# Altium PCB voltage_monitor_003.PcbDoc
Units mil, origin at the board's own origin, x right, y up, seen from the top; angles counter-clockwise.
Board outline 1417.32 x 1417.32 mil, 2 copper layers (Top Layer, Bottom Layer); 12 components, 15 nets, 58 pads, 27 vias.
Unrouted connection lines stored in the file: 1.
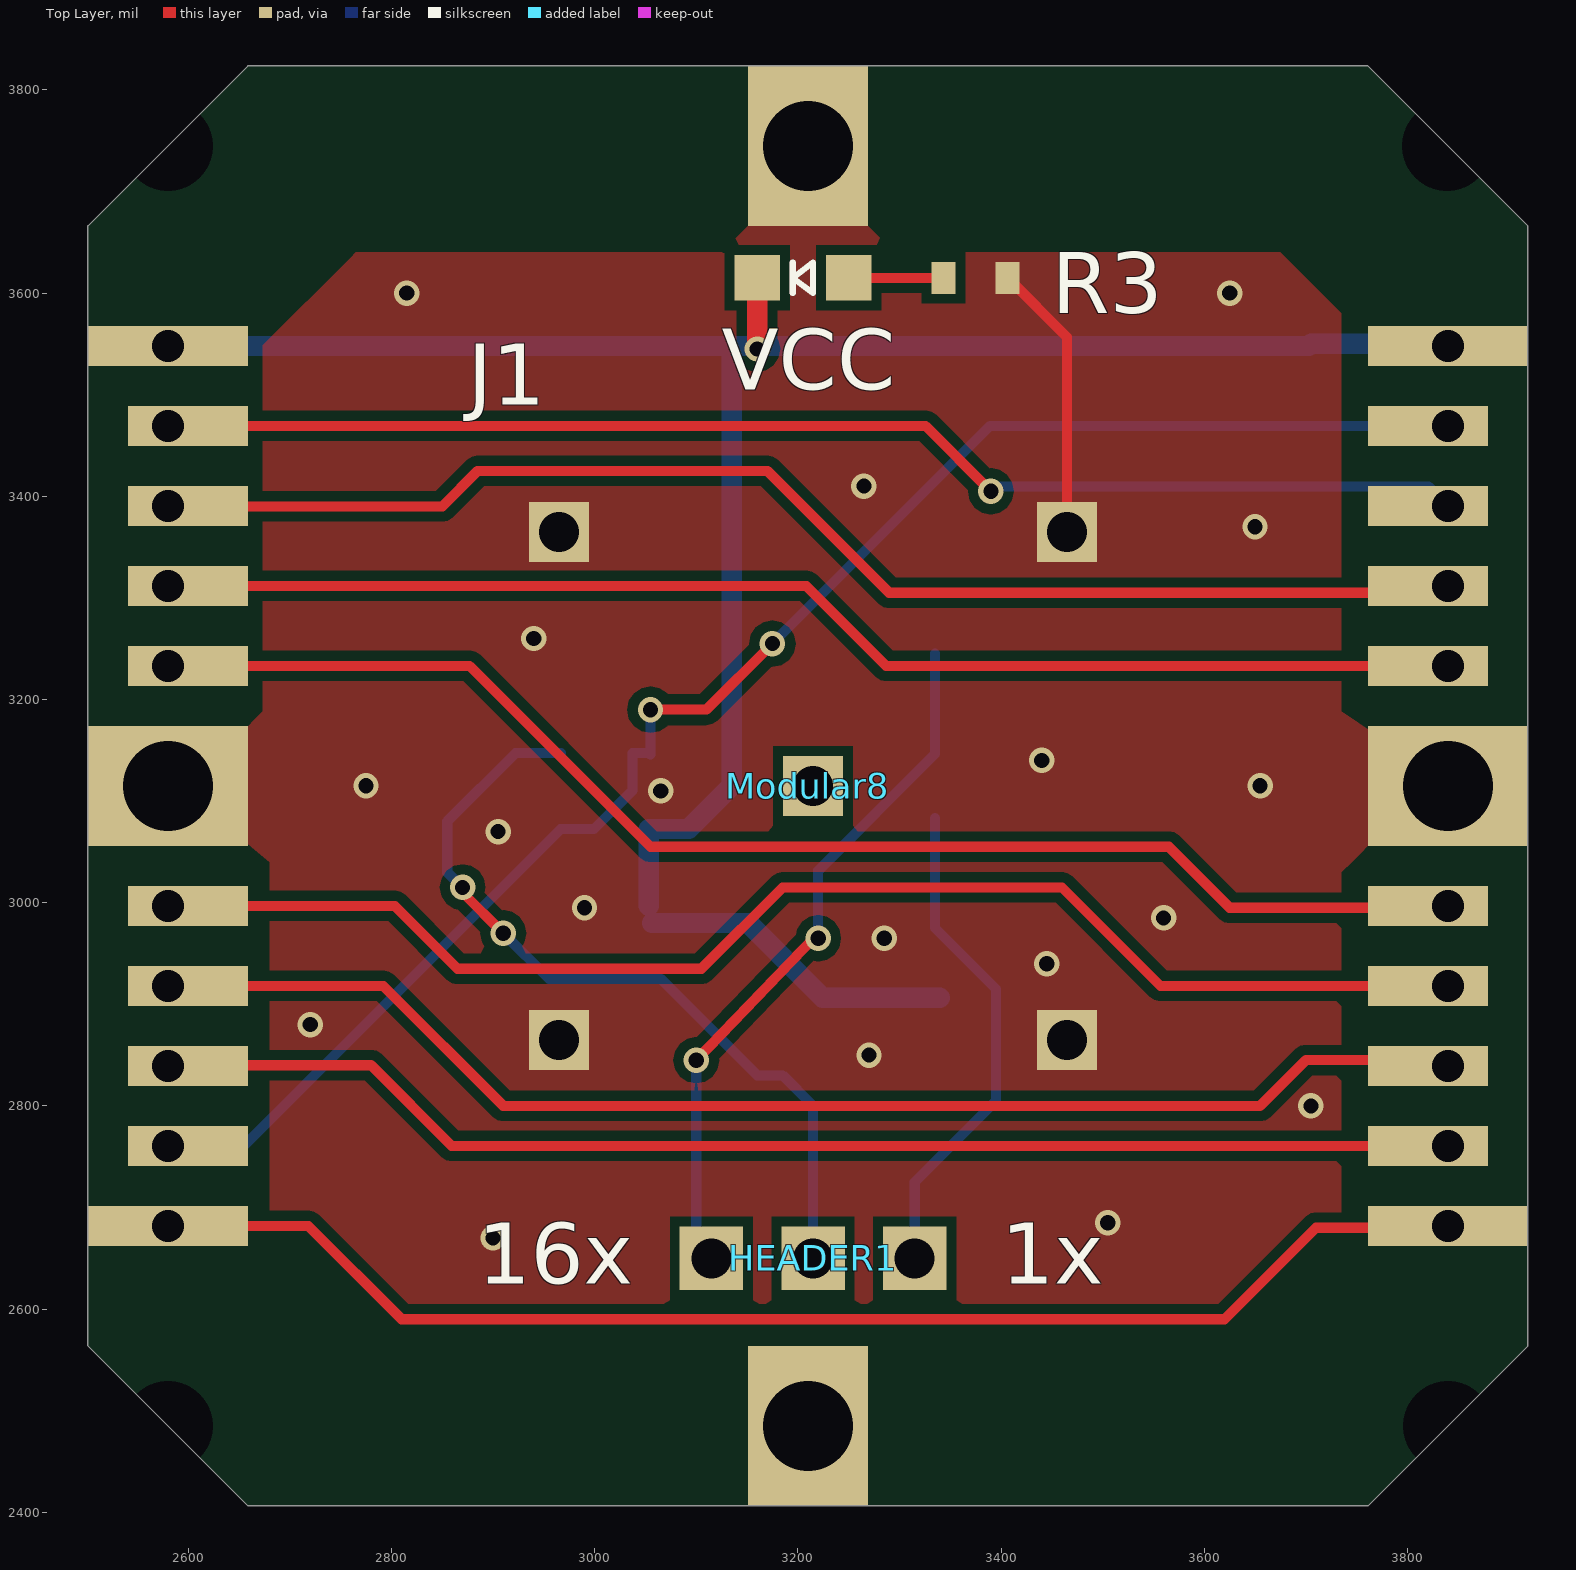
[diagram p0: Top Layer view]
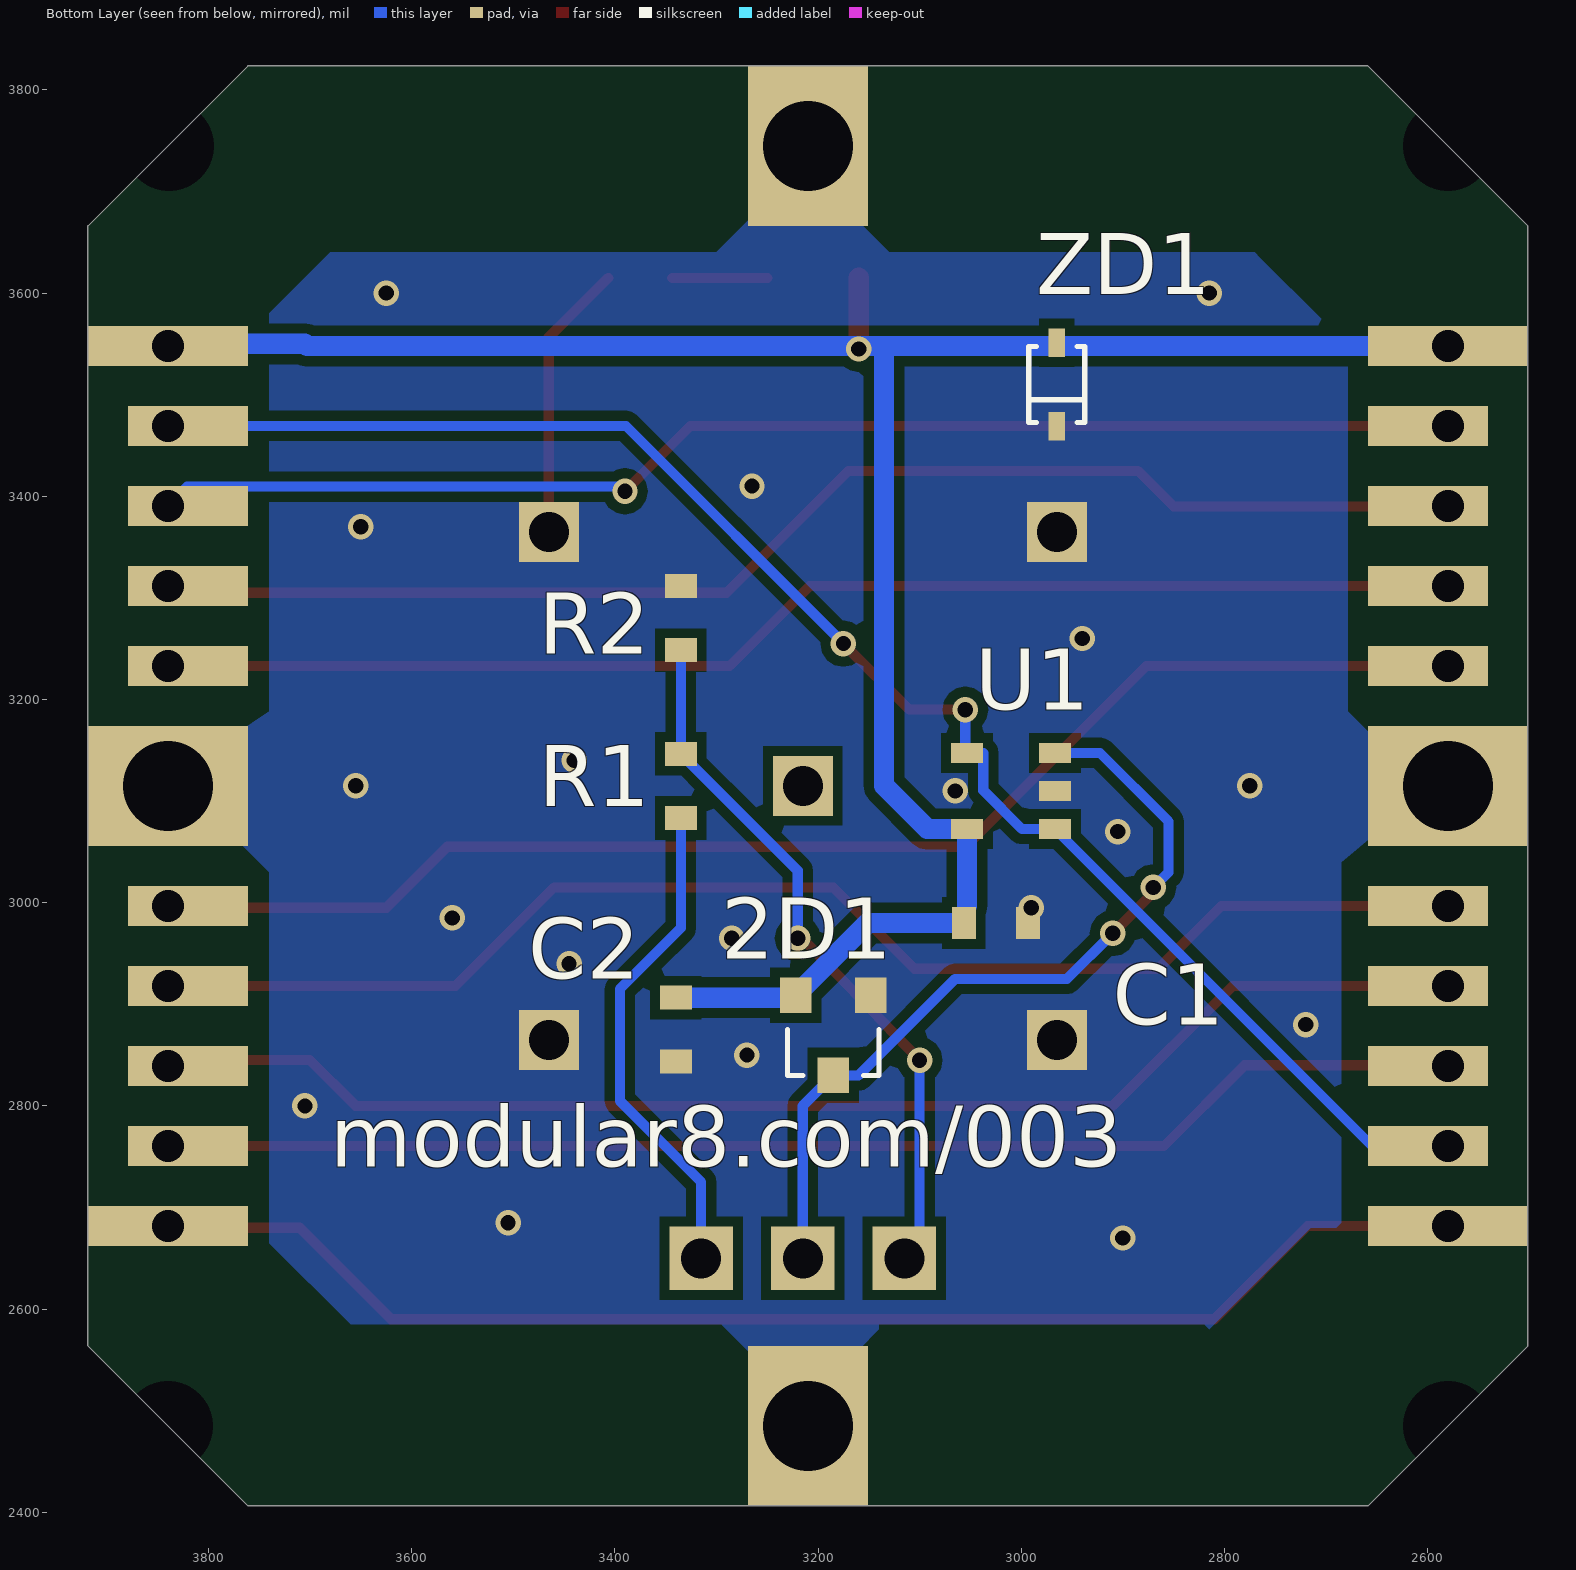
[diagram p1: Bottom Layer view, seen from below]

## Layer stack, top to bottom
Top Solder: solder mask 0.4, Solder Resist, Dk 3.5
Top Layer: signal copper 1.4
Dielectric 1: dielectric 12.6, FR-4, Dk 4.8
Bottom Layer: signal copper 1.4
Bottom Solder: solder mask 0.4, Solder Resist, Dk 3.5

## Board outline
2658.74,3823.58 2501.26,3666.1 2501.26,2563.74 2658.74,2406.26 3761.1,2406.26 3918.58,2563.74 3918.58,3666.1 3761.1,3823.58

## Design rules (kind name [scope] priority, off if disabled: settings)
Clearance [All] p1: gap=10
PolygonConnect [All] p1: connectstyle=Direct reliefconductorwidth=10 reliefentries=4 polygonreliefangle="90 Angle" airgapwidth=10
RoutingVias [All] p1: holewidth=28 width=50 viastyle="Through Hole" minholewidth=28 minwidth=50 maxholewidth=28 maxwidth=50
SolderMaskExpansion [All] p1: expansion=4
UnpouredPolygon [All] p1: allowunpoured=FALSE
Width [All] p1: maxlimit=20 minlimit=10 preferedwidth=10
29 further rules are at their usual default settings.

## Components (designator, comment, footprint, x,y, rotation, side; value= is the part's Value field where it differs from the comment)
2D1 "BAT54SW-FDICT" SOT-23-3 3185,2830 r0 bottom
C1 "Capacitor" 0603 3025,2980 r180 bottom
C2 "Capacitor" 0603 3340,2875 r270 bottom
HEADER1 "3x1" "3x1 THRU HOLES 0.1\" PITCH" 3215,2650 r90 top
J1 "BNC CONN" "BNC THROUGH HOLE" 3215,3115 r0 top
Modular8 "modular8_rev2_A&C" "modular8 edges A & C" 2580,2485 r0 top locked
R1 "Resistor" 0603 3335,3115 r90 bottom
R2 "Resistor" 0603 3335,3280 r90 bottom
R3 "Resistor" 0603 3375,3615 r0 top
U1 "MCP6001" SOT-23-5 3010,3110 r270 bottom
VCC "LEDY" "0805 - LED" 3205,3615 r180 top
ZD1 "Zener 5.1V" SOD-323F 2965,3510 r270 bottom

## Footprints (in the part's own frame and the unit in brackets; to place one, negate y for a bottom-side part, rotate by r counter-clockwise, add the part's x,y. Pads: shape width x height; smd on the part's side, far side on the other; paste and mask are expansions set on the pad)
"3x1 THRU HOLES 0.1\" PITCH" [mil]
  rect 62.5x62.5 hole 39.37 unplated: 1(0,100) 2(0,0) 3(0,-100)
0603 [mm]
  rect 0.6x0.8 smd: 1(-0.8,0) 2(0.8,0)
  body extent -1.2,-0.5 1.2,0.5, height 0.01
"0805 - LED" [mil]
  rect 45x45 smd: 1(-45,0) 2(45,0)
  silkscreen extent -10,-15 10,15, body extent -72,-27 72,27, height 0
"BNC THROUGH HOLE" [mm]
  rect 1.5x1.5 hole 1 unplated: 1(-6.35,-6.35) 1(-6.35,6.35) 1(6.35,-6.35) 1(6.35,6.35) 2(0,0)
  body extent -8.93,-8.93 8.93,8.93, height 12.7
"modular8 edges A & C" [mm]
  rect 0x0 hole 2.25 unplated copper offset 0.5,0: 999(0,0) 999(0,32) 999(31.976,32) 999(32,0)
  rect 3x1 hole 0.8 copper offset 0.5,0: A_0(0,25) A_1(0,23) A_2(0,21) A_3(0,19) A_4(0,13) A_5(0,11) A_6(0,9) A_7(0,7)
  rect 4x3 hole 2.25: A_GND(0,16) C_GND(32,16)
  rect 4x1 hole 0.8: A_V1(0,27) A_V2(0,5) C_V1(32,5) C_V2(32,27)
  rect 3x4 hole 2.25: B_GND(16,0) D_GND(16,32)
  rect 3x1 hole 0.8 copper offset -0.5,0: C_0(32,7) C_1(32,9) C_2(32,11) C_3(32,13) C_4(32,19) C_5(32,21) C_6(32,23) C_7(32,25)
  body extent -2,-2 34,34
SOD-323F [mm]
  rect 0.71x0.403 smd: 1(-1.045,0) 2(1.045,0)
  silkscreen extent -0.95,-0.7 0.95,0.7, body extent -1.4,-0.7 1.4,0.7
SOT-23-3 [mil]
  rect 31x35 smd: 1(-37,-79) 2(37,-79) 3(0,0)
  silkscreen extent -45,-45 45,0, body extent -56,-100 56,22, height 45
SOT-23-5 [mm]
  rect 0.5x0.8 smd: 1(0.95,1.1) 2(0,1.1) 3(-0.95,1.1) 4(-0.95,-1.1) 5(0.95,-1.1)
  body extent -1.3,-1.6 1.3,1.6, height 1.45

## Part data
J1: library part A33798

## Via types
v1: diameter 25, hole 15, Top Layer to Bottom Layer, 27 vias

## Nets (pads, with @x,y where several pads share a name; then routed paths per layer and width w, separated by ;. In a path a pad name is that pad's centre, name@x,y a point inside that pad or via, vN(x,y) a via of type N, cw(c..) or ccw(c..) an arc to the next point about the centre after c; other vN are vias at no path point)
AREF: Modular8.A_V2 Modular8.C_V1 | length 1335.2
  Top Layer w10: Modular8.A_V2 2718.15,2681.85 2810,2590 3620,2590 3710,2680 Modular8.C_V1@3839.84,2680
GND: 2D1.1 C1.2 C2.2 J1.1 Modular8.A_GND Modular8.B_GND Modular8.C_GND Modular8.D_GND R2.2 R3.2 U1.2 ZD1.2 | length 274.2
  Top Layer w10: R3.2 3465,3556.5 J1.1@3465,3365
  other v1: 2900,2670 3505,2685 3705,2800 3270,2850 2720,2880 3445,2940 3285,2965 3560,2985 2990,2995 2905,3070 3065,3110 2775,3115 3655,3115 3440,3140 2940,3260 3650,3370 3265,3410 2815,3600 3625,3600
Net2D1_3: 2D1.3 HEADER1.2 U1.3 | length 797.8
  Top Layer w10: v1(2870,3015) 2870,3010 v1(2910,2970)
  Bottom Layer w10: v1(2870,3015) 2855,3030 2855,3080 2922.4,3147.4 U1.3 ; v1(2910,2970) 2955,2925 3065,2925 3160,2830 2D1.3 3215,2800 HEADER1.2
NetHEADER1_1: HEADER1.1 R1.2 R2.1 | length 698.7
  Top Layer w10: v1(3100,2845) 3217.69,2967.22 v1@3217.79,2967.32
  Bottom Layer w10: v1(3100,2845) 3100,2665 HEADER1.1 ; v1(3220,2965) 3220,3031.5 R1.2 R2.1@3335,3245
NetHEADER1_3: HEADER1.3 J1.2 R1.1 | length 519.8
  Top Layer w10: HEADER1.3 HEADER1.3@3335,2670
  Bottom Layer w10: HEADER1.3 3315,2725 3395,2805 3395,2915 3335,2975 R1.1
NetModular8_A_0: Modular8.A_0 Modular8.C_6 | length 1296.2
  Top Layer w10: Modular8.A_0 3325.75,3469.25 v1(3390,3405)
  Bottom Layer w10: v1(3390,3405) 3394.53,3409.53 3820.83,3409.53 Modular8.C_6
NetModular8_A_1: Modular8.A_1 Modular8.C_5 | length 1327.1
  Top Layer w10: Modular8.A_1 2580.51,3390 2850,3390 2885,3425 3170,3425 3290,3305 3833.07,3305 Modular8.C_5
NetModular8_A_2: Modular8.A_2 Modular8.C_4 | length 1292.5
  Top Layer w10: Modular8.A_2 3208.23,3311.77 3286.97,3233.03 Modular8.C_4
NetModular8_A_3: Modular8.A_3 Modular8.C_3 | length 1359.2
  Top Layer w10: Modular8.A_3 2876.97,3233.03 3055,3055 3565,3055 3625,2995 3838.03,2995 Modular8.C_3
NetModular8_A_4: Modular8.A_4 Modular8.C_2 | length 1358.7
  Top Layer w10: Modular8.A_4 2803.19,2996.81 2865,2935 3105,2935 3185,3015 3460,3015 3556.93,2918.07 Modular8.C_2
NetModular8_A_5: Modular8.A_5 Modular8.C_1 | length 1329.7
  Top Layer w10: Modular8.A_5 2791.93,2918.07 2910,2800 3655,2800 3700,2845 3834.17,2845 Modular8.C_1
NetModular8_A_6: Modular8.A_6 Modular8.C_0 | length 1293
  Top Layer w10: Modular8.A_6 2580.67,2840 2780,2840 2859.41,2760.59 Modular8.C_0
NetModular8_A_7: Modular8.A_7 Modular8.C_7 U1.1 U1.4 | length 1602.4
  Top Layer w10: v1(3055,3190) 3110,3190 v1(3175,3255)
  Bottom Layer w10: Modular8.A_7 2654.69,2760.59 U1.1 2999.35,3072.6 3037.4,3110.65 3037.4,3147.4 U1.4 3055,3145.71 v1(3055,3190) ; v1(3175,3255) 3175,3255.27 3388.98,3469.25 Modular8.C_7
NetR3_1: R3.1 VCC.1 | length 93.5
  Top Layer w10: VCC.1 R3.1
VCC: 2D1.2 C1.1 C2.1 Modular8.A_V1 Modular8.C_V2 U1.5 VCC.2 ZD1.1 | length 2253.5
  Top Layer w20: v1(3160,3545) VCC.2
  Bottom Layer w20: Modular8.A_V1 3135,3547.99 ; 3053.31,2996.81 U1.5 3092.6,3072.6 3135,3115 3135,3547.99 ; C1.1 3151,2980 2D1.2 3224.5,2906.5 C2.1 ; Modular8.C_V2 3837.83,3550 3705,3550 3702.99,3547.99 3135,3547.99
pads on no net: Modular8.999

## Polygon pours and split planes (outlines as drawn)
GND on Bottom Layer "Bottom Layer-No Net" (solid, remove dead copper, pour order 4): 3160,2560 3140,2580 3140,2585 2820,2585 2815,2580 2715,2680 2685,2680 2685,3040 2649.17,3069.85 2655,3165 2678.48,3188.48 2678.48,3548.48 2765,3635 2770,3640 3125,3640 3130,3640 3165,3675 3265,3675 3300,3640 3680,3640 3735,3585 3740,3580 3740,3188.48 3775,3165 3775,3065 3750,3040 3740,3030 3740,2665 3660,2585 3295,2585 3265,2555
GND on Top Layer "Bottom Layer-No Net" (solid, remove dead copper, pour order 3): 3155,2560 3135,2580 3135,2585 2815,2585 2810,2580 2710,2680 2680,2680 2680,3040 2644.17,3069.85 2650,3165 2673.48,3188.48 2673.48,3548.48 2760,3635 2765,3640 3120,3640 3125,3640 3160,3675 3260,3675 3295,3640 3675,3640 3730,3585 3735,3580 3735,3188.48 3770,3165 3770,3065 3745,3040 3735,3030 3735,2665 3655,2585 3290,2585 3260,2555

## Silkscreen, mask and mechanical layers (free items; w line width, h text height)
Top Overlay:
  text "16x" at 2885,2625 h60
  text "1x" at 3400,2625 h60
Bottom Overlay:
  text "modular8.com/003" at 3680,2740 h60